# Altium PCB Layout.PcbDoc
Units mil, origin at the board's own origin, x right, y up, seen from the top; angles counter-clockwise.
Board outline 2500 x 3500 mil, 2 copper layers (Top Layer, Bottom Layer); 31 components, 42 nets, 188 pads, 47 vias.
Unrouted connection lines stored in the file: 3.
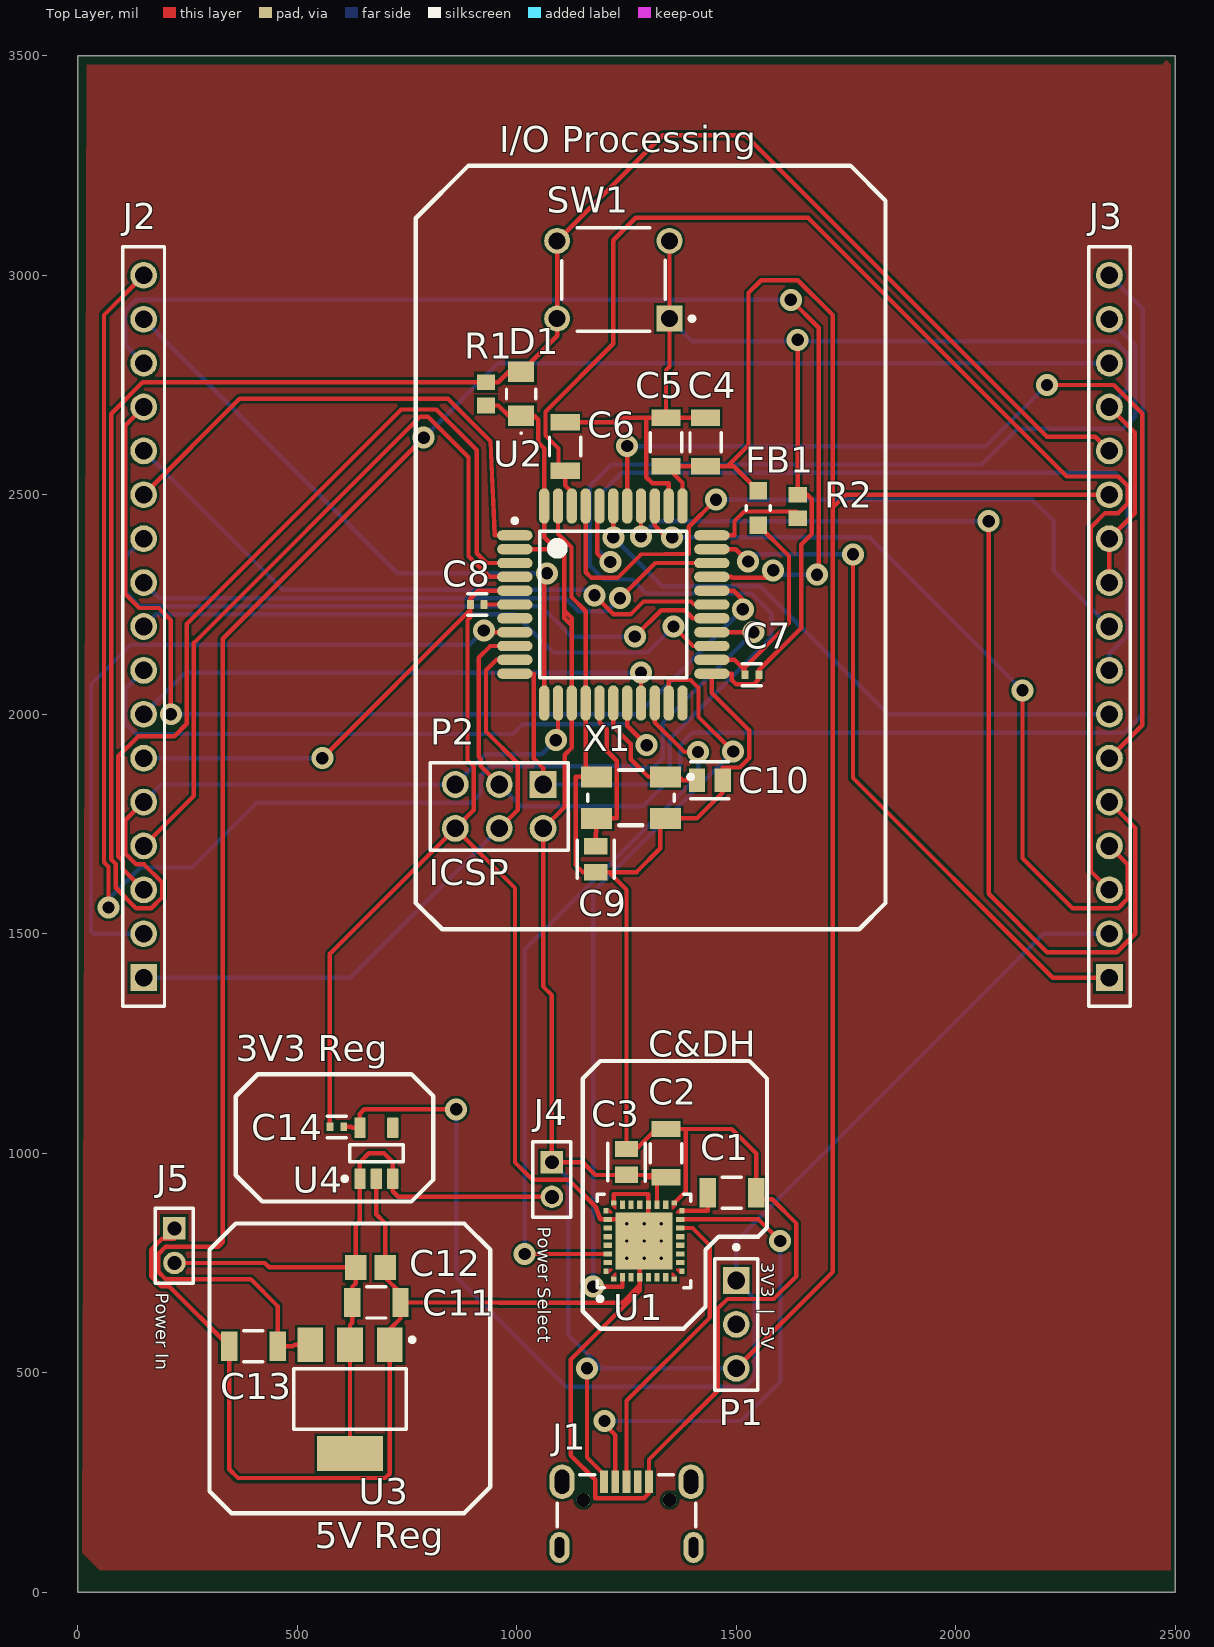
[diagram p0: Top Layer view]
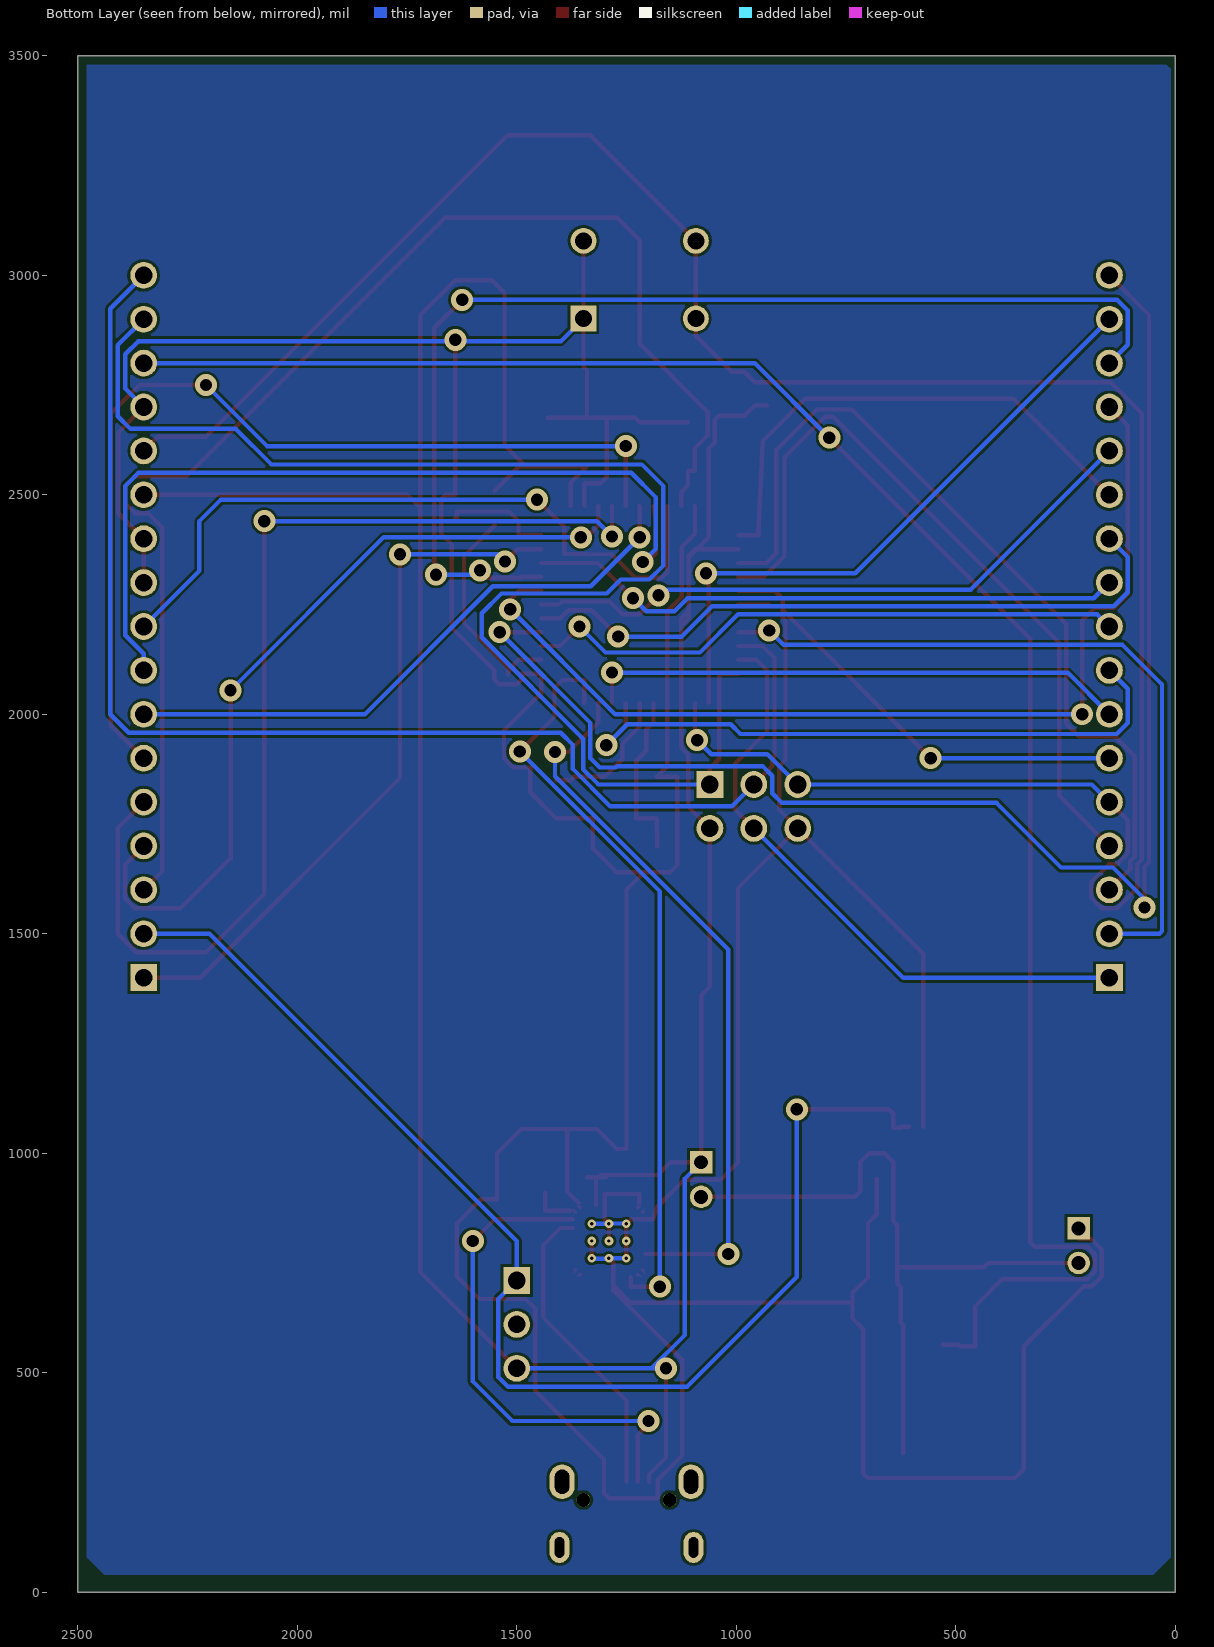
[diagram p1: Bottom Layer view, seen from below]
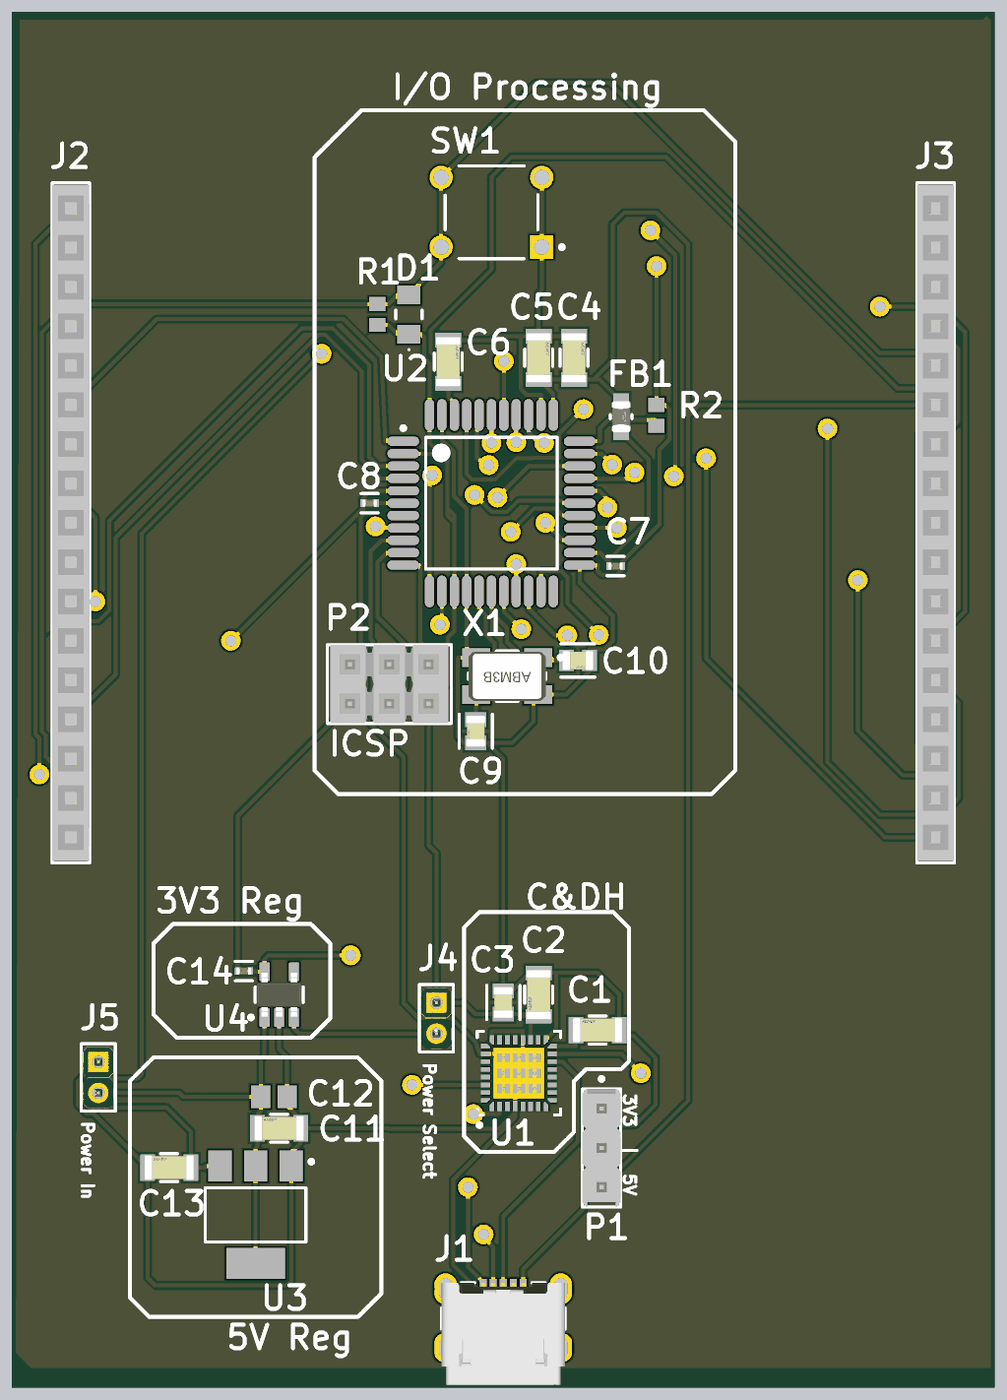
[diagram p2: 3D render of the assembled board from above, using the file's embedded part models]

## Layer stack, top to bottom
Top Solder: solder mask 0.4, Solder Resist, Dk 3.5
Top Layer: signal copper 1.4
Dielectric 1: dielectric 12.6, FR-4, Dk 4.8
Bottom Layer: signal copper 1.4
Bottom Solder: solder mask 0.4, Solder Resist, Dk 3.5

## Board outline
0,0 2500,0 2500,3500 0,3500

## Design rules (kind name [scope] priority, off if disabled: settings)
Clearance [All] p1: gap=6.2 ignorepadtopadclearanceinfootprint=FALSE
PolygonConnect [All] p1: connectstyle=Relief reliefconductorwidth=10 reliefentries=4 polygonreliefangle="90 Angle" airgapwidth=10
RoutingVias [All] p1: holewidth=28 width=50 viastyle="Through Hole" minholewidth=28 minwidth=50 maxholewidth=28 maxwidth=50
SolderMaskExpansion [All] p1: expansion=4 istentingtop=FALSE
Width [All] p1: maxlimit=10 minlimit=10 preferedwidth=10
30 further rules are at their usual default settings.

## Classes and differential pairs
component class 03-Power: C11 C12 C13 C14 J4 J5 U3 U4
component class 02-IC: C4 C5 C6 C7 C8 C9 C10 D1 FB1 J2 J3 P2 R1 R2 SW1 U2 X1
component class 01-IC: C1 C2 C3 J1 P1 U1

## Components (designator, comment, footprint, x,y, rotation, side; value= is the part's Value field where it differs from the comment)
C1 "0.1uF" FP-C1206C-EB-MFG 1490,910 r0 top value="0.10 μF"
C2 "0.1uF" FP-C1206C-EB-MFG 1340,1000 r90 top value="0.10 μF"
C3 "10uF" FP-C0805C-DG-MFG 1250,980 r90 top
C4 "0.1uF" FP-C1206C-EB-MFG 1430,2620 r270 top value="0.10 μF"
C5 "0.1uF" FP-C1206C-EB-MFG 1340,2620 r270 top value="0.10 μF"
C6 "0.1uF" FP-C1206C-EB-MFG 1110,2610 r270 top value="0.10 μF"
C7 "1uF" FP-GRM15-0_1-MFG 1535.75,2090 r0 top
C8 "1uF" FP-GRM15-0_1-MFG 910,2250 r180 top
C9 "22pF" FP-C0805C-DN-MFG 1180,1670 r90 top value="22 pF"
C10 "22pF" FP-C0805C-DN-MFG 1440,1850 r180 top value="22 pF"
C11 "0.1uF" FP-C1206C-EB-MFG 680,660 r0 top value="0.10 μF"
C12 "22uF" CAPC2013X140X45NL15T25 666.54,740 r180 top
C13 "0.1uF" FP-C1206C-EB-MFG 400,560 r0 top value="0.10 μF"
C14 "1uF" FP-GRM15-0_1-MFG 590,1060 r180 top
D1 "150mA" BOUR-CD1206-S01575-2_L 1010,2730 r270 top
FB1 "MH2029-300Y" FP-MH2029-MFG 1550,2470 r90 top value=30Ω
J1 "629105150521" 629105150521 1250,137.25 r0 top
J2 "SSQ-117-01-G-S" SMTC-SSQ-117-01-X-S 150,1400 r90 top
J3 "SSQ-117-01-G-S" SMTC-SSQ-117-01-X-S 2350,1400 r90 top
J4 "M22-2510205" FP-M22-2510205-MFG 1080,940 r270 top
J5 "M22-2510205" FP-M22-2510205-MFG 220,789.37 r270 top (schematic designator J?)
P1 "22-28-4033" MOLX-22-28-4033_V 1500,610 r270 top
P2 "TSW-103-08-G-D" SMTC-TSW-103-08-X-D 1060,1840 r180 top
R1 "10kR" RESC1609X50X30ML10T20 930,2730 r270 top
R2 "10kR" RESC1609X50X30ML10T20 1640,2473.42 r270 top
SW1 "1825910-6" TECO-1825910-6_V 1220,2990 r180 top
U1 "FT232RQ-Reel" PQFN5X5-32_V 1290,800 r90 top
U2 "ATmega32U4-AU" 44ML_M 1220,2250 r0 top
U3 "NCP1117ST33T3G" ONSC-SOT-223-4-318H-01_A_V 620,440 r270 top
U4 "LP2985-33DBVR" DBV0005A_M 680,1000 r90 top
X1 "16MHz" ABRA-ABM3B-4_V 1260,1810 r180 top

## Footprints (in the part's own frame and the unit in brackets; to place one, negate y for a bottom-side part, rotate by r counter-clockwise, add the part's x,y. Pads: shape width x height; smd on the part's side, far side on the other; paste and mask are expansions set on the pad)
44ML_M [mm] "Thin QFP, 44-Leads, Body 10x10mm, Pitch 0.8mm, IPC Low Density"
  oval 2.05x0.6 smd: 1(-5.7,4) 2(-5.7,3.2) 3(-5.7,2.4) 4(-5.7,1.6) 5(-5.7,0.8) 6(-5.7,0) 7(-5.7,-0.8) 8(-5.7,-1.6) 9(-5.7,-2.4) 10(-5.7,-3.2) 11(-5.7,-4) 23(5.7,-4) 24(5.7,-3.2) 25(5.7,-2.4) 26(5.7,-1.6) 27(5.7,-0.8) 28(5.7,0) 29(5.7,0.8) 30(5.7,1.6) 31(5.7,2.4) 32(5.7,3.2) 33(5.7,4)
  oval 0.6x2.05 smd: 12(-4,-5.7) 13(-3.2,-5.7) 14(-2.4,-5.7) 15(-1.6,-5.7) 16(-0.8,-5.7) 17(0,-5.7) 18(0.8,-5.7) 19(1.6,-5.7) 20(2.4,-5.7) 21(3.2,-5.7) 22(4,-5.7) 34(4,5.7) 35(3.2,5.7) 36(2.4,5.7) 37(1.6,5.7) 38(0.8,5.7) 39(0,5.7) 40(-0.8,5.7) 41(-1.6,5.7) 42(-2.4,5.7) 43(-3.2,5.7) 44(-4,5.7)
  silkscreen extent -5.82,-4.25 4.25,4.97, body extent -5,-5 5,5, height 1.2
629105150521 [mm] "Micro USB 2.0 SMT Type B Horizontal 5 Contacts High Current"
  rect 0.45x1.3 smd: 1(-1.3,2.9) 2(-0.65,2.9) 3(0,2.9) 4(0.65,2.9) 5(1.3,2.9)
  round 0.8 hole 0.8 unplated: MH1(-2.5,1.85) MH2(2.5,1.85)
  oval 1.15x1.8 hole 0.55 slot 1.2 at 90 deg: Shell(-3.875,-0.9) Shell(3.875,-0.9)
  oval 1.45x2 hole 0.85 slot 1.4 at 90 deg: Shell(-3.725,2.9) Shell(3.725,2.9)
  silkscreen extent -4,0.3 4,3.3, body extent -4,-3.3 4,3.3, height 2.75
ABRA-ABM3B-4_V [mm] "SMD, 4-Leads, Body 5x3.2mm"
  rect 1.8x1.2 smd: 1(-2,-1.2) 2(2,-1.2) 3(2,1.2) 4(-2,1.2)
  silkscreen extent -3.58,-1.6 2.5,1.6, body extent -2.5,-1.59 2.5,1.59, height 1.13
BOUR-CD1206-S01575-2_L [mm] "Molded Diode, 2-Leads, Body 3.4x1.7mm, IPC High Density"
  rect 1.2x1.5 smd: 1(-1.275,0) 2(1.275,0)
  silkscreen extent -0.27,-0.85 2.32,0.85, body extent -1.7,-0.85 1.7,0.85, height 0.95
CAPC2013X140X45NL15T25 [mm] "Chip Capacitor, 2-Leads, Body 2.00x1.25mm, IPC Medium Density"
  rect 1.25x1.45 smd: 1(-0.85,0) 2(0.85,0)
  body extent -1.08,-0.7 1.07,0.7, height 1.4
DBV0005A_M [mm] "SOT23, 5-Leads, Body 3.05x1.75mm, Pitch 0.95mm, IPC Low Density"
  rrect15% 1.2x0.65 smd: 1(-1.475,0.95) 2(-1.475,0) 3(-1.475,-0.95) 4(1.475,-0.95) 5(1.475,0.95)
  silkscreen extent -1.6,-1.55 0.5,1.95, body extent -1.42,-1.46 1.42,1.46, height 1.08
FP-C0805C-DG-MFG [mm]
  rect 0.95x1.35 smd paste+0 mask+0: 1(-0.75,0) 2(0.75,0)
  silkscreen extent -1.11,-1.08 1.1,1.07, body extent -1.4,-0.85 1.4,0.85, height 0.25
FP-C0805C-DN-MFG [mm]
  rect 0.95x1.35 smd paste+0 mask+0: 1(-0.75,0) 2(0.75,0)
  silkscreen extent -1.1,-1.07 1.1,1.07, body extent -1.4,-0.85 1.4,0.85, height 0.25
FP-C1206C-EB-MFG [mm]
  rect 0.95x1.7 smd paste+0 mask+0: 1(-1.4,0) 2(1.4,0)
  silkscreen extent -0.55,-0.9 0.55,0.9, body extent -2,-1 2,1, height 0.25
FP-GRM15-0_1-MFG [mm]
  rect 0.4x0.5 smd paste+0 mask+0: 1(-0.4,0) 2(0.4,0)
  silkscreen extent -0.55,-0.62 0.55,0.62, body extent -0.7,-0.38 0.7,0.38, height 0.25
FP-M22-2510205-MFG [mm]
  rect 1.3x1.3 hole 0.8 paste-1000 mask+0: 1(-1,0)
  round 1.3 hole 0.8 paste-1000 mask+0: 2(1,0)
  silkscreen extent -2.18,-1.1 2.18,1.1, body extent -2.27,-1.2 2.27,1.2, height 0.25
FP-MH2029-MFG [mm]
  rect 1x1 smd paste+0 mask+0: 1(-1,0) 2(1,0)
  silkscreen extent -0.13,-0.7 0.13,0.7, body extent -1.6,-0.8 1.6,0.8, height 0.25
MOLX-22-28-4033_V [mm] "THD, 3-Leads, Body 7.62x2.49mm, Pitch 2.54mm"
  rect 1.55x1.55 hole 1.02: 1(-2.54,0)
  round 1.55 hole 1.02: 2(0,0) 3(2.54,0)
  silkscreen extent -4.58,-1.25 3.81,1.25, body extent -3.81,-1.24 3.81,1.24, height 8.38
ONSC-SOT-223-4-318H-01_A_V [mm] "SOT223, 4-Leads, Body 6.5x3.5mm, Pitch 2.3mm"
  rect 2x1.5 smd: 1(-3.15,2.3) 2(-3.15,0) 3(-3.15,-2.3)
  rect 2x3.8 smd: 4(3.15,0)
  silkscreen extent -3.55,-3.25 1.75,3.73, body extent -1.75,-3.25 1.75,3.25, height 1.8
PQFN5X5-32_V [mm] "QFN, 32-Leads, Body 5x5mm, Pitch 0.5mm, Thermal Pad 3.3x3.3mm, FTDI Recommended"
  rect 0.3x0.3 smd paste-0.15 mask-0.15: 1(-2.2,1.75) 8(-2.2,-1.75) 9(-1.75,-2.2) 16(1.75,-2.2) 17(2.2,-1.75) 24(2.2,1.75) 25(1.75,2.2) 32(-1.75,2.2)
  rect 0.5x0.3 smd paste-0.15 mask+0.06: 2(-2.1,1.25) 3(-2.1,0.75) 4(-2.1,0.25) 5(-2.1,-0.25) 6(-2.1,-0.75) 7(-2.1,-1.25) 18(2.1,-1.25) 19(2.1,-0.75) 20(2.1,-0.25) 21(2.1,0.25) 22(2.1,0.75) 23(2.1,1.25)
  rect 0.3x0.5 smd paste-0.15 mask+0.06: 10(-1.25,-2.1) 11(-0.75,-2.1) 12(-0.25,-2.1) 13(0.25,-2.1) 14(0.75,-2.1) 15(1.25,-2.1) 26(1.25,2.1) 27(0.75,2.1) 28(0.25,2.1) 29(-0.25,2.1) 30(-0.75,2.1) 31(-1.25,2.1)
  rect 3.3x3.3 smd paste-1.65 mask+0.06: 33(0,0)
  Top Layer region: 1.6,-1.85 1.6,-2.05 1.9,-2.05 1.7,-1.85
  Top Layer region: -1.6,2.05 -1.6,1.85 -1.7,1.85 -1.9,2.05
  Top Layer region: 1.6,2.05 1.6,1.85 1.7,1.85 1.9,2.05
  Top Layer region: -1.6,-2.05 -1.6,-1.85 -1.7,-1.85 -1.9,-2.05
  Top Layer region: -2.05,1.6 -1.85,1.6 -1.85,1.7 -2.05,1.9
  Top Layer region: 2.05,1.6 1.85,1.6 1.85,1.7 2.05,1.9
  Top Layer region: 2.05,-1.6 1.85,-1.6 1.85,-1.7 2.05,-1.9
  Top Layer region: -2.05,-1.6 -1.85,-1.6 -1.85,-1.7 -2.05,-1.9
  silkscreen extent -3.47,-2.7 2.7,2.7, body extent -2.55,-2.55 2.55,2.55, height 1
RESC1609X50X30ML10T20 [mm] "Chip Resistor, 2-Leads, Body 1.55x0.85mm, IPC Low Density"
  rect 0.9x1.05 smd: 1(-0.675,0) 2(0.675,0)
  body extent -0.82,-0.48 0.82,0.48, height 0.5
SMTC-SSQ-117-01-X-S [mm] "SQ Post Socket, 1x17 Pins, Vertical, 2.54mm Pitch, Female"
  rect 1.55x1.55 hole 1.02: 1(0,0)
  round 1.55 hole 1.02: 2(2.54,0) 3(5.08,0) 4(7.62,0) 5(10.16,0) 6(12.7,0) 7(15.24,0) 8(17.78,0) 9(20.32,0) 10(22.86,0) 11(25.4,0) 12(27.94,0) 13(30.48,0) 14(33.02,0) 15(35.56,0) 16(38.1,0) 17(40.64,0)
  silkscreen extent -1.65,-1.2 42.29,1.2, body extent -1.52,-1.21 42.16,1.21, height 8.51
SMTC-TSW-103-08-X-D [mm] ".025 SQ Post Terminal Strip Assembly, 2x3 Pins, Vertical, 2.54mm Pitch, Male"
  rect 1.55x1.55 hole 1.02: 1(0,0)
  round 1.55 hole 1.02: 2(0,2.54) 3(2.54,0) 4(2.54,2.54) 5(5.08,0) 6(5.08,2.54)
  silkscreen extent -1.46,-1.27 6.54,3.81, body extent -1.27,-1.27 6.35,3.81, height 8.38
TECO-1825910-6_V [mm] "Switch, 4-Leads, Body 5.99x5.99mm"
  rect 1.5x1.5 hole 0.99: 1(-3.25,2.25)
  round 1.5 hole 0.99: 2(3.25,2.25) 3(-3.25,-2.25) 4(3.25,-2.25)
  silkscreen extent -4.68,-3 3,3, body extent -3,-2.99 2.99,3, height 5

## Part data
C1 C2 C4 C5 C6 C11 C13: library part CMP-03020-000153-1, "CAP CER 0.1UF 100V X7R 1206", Capacitance="0.10 μF", Manufacturer=KEMET, Manufacturer Part Number=C1206C104K1RACTU, Package=C1206C-EB, Temperature="-55°C to +150°C", Temperature Characteristic=X7R, Temperature Coefficient=15%, Temperature Range High=+150°C, Temperature Range Low=-55°C, Tolerance=0.1, Voltage Rating="100 V", Automotive=Yes, Automotive Grade="Grade 0", Category=Cap, ComponentLink2Description=Datasheet, ComponentLink2URL=https://content.kemet.com/datasheets/KEM_C1007_X8R_ULTRA_150C_SMD.pdf, Device Class L1="Passive Components", Device Class L2=Capacitors, Device Class L3="Ceramic Capacitors", Digikey Description="CAP CER 0.1UF 100V X7R 1206", Height=0.88mm, Ipc Land Pattern Name=CAPC320160X78, Lead Free=Yes, Material=Ceramic, Mouser Description="CAP CER 0.1UF 100V X7R 1206", Octopart=https://octopart.com/c1206c104k1ractu-kemet-89521, RoHS=TRUE
C3: library part CMP-03020-001692-1, "CAP CER 10UF 10V X5R 0805", 3DS Part Number=220-00001, Manufacturer=Kemet, Manufacturer Part Number=C0805C106K8PACTU, Package=C0805C-DG, Temperature="-55°C to +85°C", Temperature Characteristic=X5R, Temperature Coefficient=15%, Temperature Range High=+85°C, Temperature Range Low=-55°C, Tolerance=10%, Voltage=10V, Automotive=No, Capacitance=10uF, Category=Cap, ComponentLink2Description=Datasheet, ComponentLink2URL=https://content.kemet.com/datasheets/KEM_C1006_X5R_SMD.pdf, Device Class L1="Passive Components", Device Class L2=Capacitors, Device Class L3="Ceramic Capacitors", Digikey Description="CAP CER 10UF 10V X5R 0805", Height=1.4mm, Ipc Land Pattern Name=CAPC200125X125, Lead Free=Yes, Material=Ceramic, Mouser Description="CAP CER 10UF 10V X5R 0805", Octopart=https://octopart.com/c0805c106k8pactu-kemet-98697, RoHS=TRUE, Voltage Rating=10V
C7 C8 C14: library part CMP-06035-000073-1, "CAP CER 1UF 10V X5R 0402", Manufacturer=Murata, Manufacturer Part Number=GRM155R61A105KE15D, Package=GRM15-0.1, Temperature="-55°C to +85°C", Temperature Characteristic=X5R, Temperature Coefficient=15%, Temperature Range High=+85°C, Temperature Range Low=-55°C, Tolerance=10%, Voltage Rating=10V, Automotive=No, Capacitance=1uF, Category=Cap, ComponentLink2Description=Datasheet, ComponentLink2URL=https://search.murata.co.jp/Ceramy/image/img/A01X/G101/ENG/GRM155R61A105KE15-01A.pdf, Device Class L1="Passive Components", Device Class L2=Capacitors, Device Class L3="Ceramic Capacitors", Digikey Description="CAP CER 1UF 10V X5R 0402", Height=0.55mm, Ipc Land Pattern Name=CAPC10050X50, Lead Free=Yes, Material=Ceramic, Mouser Description="0402 1 uF 10 V ±10% Tolerance X5R Surface Mount Multilayer Ceramic Capacitor", Octopart=https://octopart.com/grm155r61a105ke15d-murata-197442, RoHS=TRUE
C9 C10: library part CMP-03020-014268-1, "Capacitor; Ceramic; Cap; 22.0pF; Tol 5%; SMT; Vol-Rtg 50V; C0G; Tape and Reel", Capacitance="22 pF", Manufacturer=KEMET, Manufacturer Part Number=C0805C220J5GACTU, Package=C0805C-DN, Temperature="-55°C to +125°C", Temperature Characteristic=C0G, Temperature Coefficient=30ppm/°C, Temperature Range High=+125°C, Temperature Range Low=-55°C, Tolerance=0.05, Voltage Rating="50 V", Automotive=No, Category=Cap, ComponentLink2Description=Datasheet, ComponentLink2URL=https://content.kemet.com/datasheets/KEM_C1003_C0G_SMD.pdf, Device Class L1="Passive Components", Device Class L2=Capacitors, Device Class L3="Ceramic Capacitors", Digikey Description="Capacitor; Ceramic; Cap; 22.0pF; Tol 5%; SMT; Vol-Rtg 50V; C0G; Tape and Reel", Height=0.88mm, Ipc Land Pattern Name=CAPC200125X78, Lead Free=Yes, Material=Ceramic, Mouser Description="Multilayer Ceramic Capacitors MLCC - SMD/SMT 50volts 22pF C0G 5%", Octopart=https://octopart.com/c0805c220j5gactu-kemet-145470, RoHS=TRUE
C12: library part CMP-2007-03385-1, Manufacturer=Murata, Part Number=GRM21BR60J226ME39L
D1: library part CMP-0583-00001-2, "75 V Small Signal Switching Diode, 150 mA, 2.5 uA, 1026 Molded Package, RoHS, Tape and Reel", Average Forward Current="150 mA", Capacitance Between Terminals (Max.)="3 pF", Forward Voltage (Max.)="1.00 V", Manufacturer=Bourns, PartNumber=CD1206-S01575, Reverse Current (Max.)="2.5 uA", Reverse Voltage="75 V", ComponentLink1Description="Manufacturer URL", ComponentLink1URL=http://www.bourns.com/, ComponentLink2Description=Datasheet, ComponentLink2URL=http://www.bourns.com/data/global/pdfs/CD1206_S01575.pdf, ComponentLink3Description="Package Specification", ComponentLink3URL=http://www.bourns.com/data/global/pdfs/CD1206_S01575.pdf, DatasheetVersion="Rev. 06/11", Mounting Technology="Surface Mount", PackageDescription="2-Pin SMD, Body 3.2 x 1.5 mm", PackageReference=CD1206-S01575-2, Packing="Tape and Reel", Reverse Recovery Time (Max.)="4 nS", RoHS=TRUE
FB1: library part CMP-07252-000001-1, "FERRITE BEAD 30 OHM 0805 1LN", Impedance At Frequency="30Ω @ 100MHz", Manufacturer=Bourns, Package=MH2029, Resistance=30Ω, Rms Current=3A, Series Resistance=25mΩ, Temperature="-55°C to +125°C", Temperature Range High=+125°C, Temperature Range Low=-55°C, Tolerance=25%, Automotive=No, Category=FBead, ComponentLink2Description=Datasheet, ComponentLink2URL=https://www.bourns.com/docs/Product-Datasheets/mh.pdf, Core Material=Ferrite, Device Class L1="Passive Components", Device Class L2="EMI / RFI Components", Device Class L3="Ferrite Beads and Chips", Digikey Description="FERRITE BEAD 30 OHM 0805 1LN", Height=1.1mm, Ipc Land Pattern Name=CAPC200120X90, Lead Free=Yes, Manufacturer Part Number=MH2029-300Y, Mouser Description="Ferrite Beads 30 ohms 25% HIGH CURRENT", Octopart=https://octopart.com/mh2029-300y-bourns-756929, RoHS=TRUE
J1: library part CMP-1502-03252-1, "Micro USB 2.0 Type B Receptacle WR-COM, Horizontal, SMT, with Pegs, High Current at Pin 1 & Pin 5", Contact Resistance=30mOhm, Manufacturer="Wurth Elektronik", Operating Temperature=-40to85degC, Rated Current=3A, Working Voltage=30VAC, Connector Type=MicroUSB2.0TypeB, Datasheet URL=https://katalog.we-online.de/em/datasheet/629105150521.pdf, Gender=Receptacle, Manufacturer URL=http://www.we-online.de, Mounting Technology=SMT, Orientation=Horizontal, Package Reference=629105150521, Packaging=TapeandReel, Part Number=629105150521, Publisher=WurthElektronik
J2 J3: library part CMP-1023-00316-1, "SQ Post Socket, Through-hole, Vertical, -55 to 125 degC, 2.54 mm Pitch, 17-Pin, Female, RoHS", Manufacturer=Samtec, Temperature Range="-55 to 125 degC", ComponentLink1Description="Manufacturer URL", ComponentLink1URL=http://www.samtec.com, ComponentLink2Description=Datasheet, ComponentLink2URL=http://www.samtec.com/documents/webfiles/pdf/SSQ_TH.PDF, ComponentLink3Description="Package Specification", ComponentLink3URL=http://www.samtec.com/documents/webfiles/cpdf/SSQ-1XX-XX-XXX-X-XX-XXX-XX-X-MKT.pdf, DatasheetVersion=F-214, Mounting Technology=Through-hole, Orientation=Vertical, PackageDescription="Assembly, Socket Strip .025[0.64] SQ Tail", PackageReference=SSQ-117-01-X-S, PackageVersion="BD, 6/1987", PartNumber=SSQ-117-01-G-S, Pitch="2.54 mm", RoHS=True
J4 J5: library part CMP-15831-000005-1, "CONN HEADER VERT 2POS 2MM", Current Rating=2A, Manufacturer=Harwin, Package=0, Temperature="-40°C to +105°C", Temperature Range High=+105°C, Temperature Range Low=-40°C, Automotive=No, Category=Conn, ComponentLink2Description=Datasheet, ComponentLink2URL=https://cdn.harwin.com/pdfs/C018XX_M22_Series_Connectors.pdf, Conn Gender=Male, Conn Orientation=Vertical, Contact material=Gold,Nickel, Device Class L1=Connectors, Device Class L2="Headers and Wire Housings", Device Class L3=unset, Digikey Description="CONN HEADER VERT 2POS 2MM", Footprint Url=https://cdn.harwin.com/pdfs/M22-251.pdf, Height=5.45mm, Lead Free=Yes, Manufacturer Part Number=M22-2510205, Mouser Description="Headers & Wire Housings 2 PIN SIL VERTICAL GOLD PIN HEADER", Number Of Contacts=2, Number Of Rows=1, Octopart=https://octopart.com/m22-2510205-harwin-2538221, Pitch=2mm, RoHS=TRUE
P1: library part CMP-1676-00001-5, "Male Header, Pitch 2.54 mm, 1 x 3 Position, Height 8.38 mm, Tail Length 3.18 mm, RoHS, Bulk", Colour=Black, Current Rating="4 A", Manufacturer=Molex, Max Operating Temperature="75 degC", Min Operating Temperature="0 degC", Package Quantity=1, Voltage Rating="250 V", ComponentLink1Description="Manufacturer URL", ComponentLink1URL=http://www.molex.com/, ComponentLink2Description=Datasheet, ComponentLink2URL=http://www.molex.com/pdm_docs/sd/022284033_sd.pdf, Contact Finish=Gold, Contact material=Brass, Contact Plating=Gold, DatasheetVersion="Rev. G, 01/2012", Height="8.38 mm", Lead Pitch="0.1 inch", Length="7.62 mm", Mount="Through Hole", Mounting Technology="Through Hole", PackageDescription="Male Header, Pitch 2.54 mm, 1 x 3 Position, Height 8.38 mm, Tail Length 3.18 mm", PackageReference=22-28-4033, Packaging=Bulk, Pins=3, REACH SVHC=Unknown, RoHSCompliant=true, Rows=1
P2: library part CMP-1024-00338-1, "0.025\" SQ Post Header, Through-hole, Vertical, -55 to 125 degC, 2.54 mm Pitch, 6-Pin, Male, RoHS", Manufacturer=Samtec, Temperature Range="-55 to 125 degC", ComponentLink1Description="Manufacturer URL", ComponentLink1URL=http://www.samtec.com, ComponentLink2Description=Datasheet, ComponentLink2URL=http://www.samtec.com/documents/webfiles/pdf/TSW_TH.PDF, ComponentLink3Description="Package Specification", ComponentLink3URL=http://www.samtec.com/documents/webfiles/cpdf/TSW-XXX-XX-XXX-X-XX-XXX-MKT.pdf, DatasheetVersion=F-214, Mounting Technology=Through-hole, Orientation=Vertical, PackageDescription=".025[0.64] SQ. Post Terminal Strip Assembly", PackageReference=TSW-103-08-X-D, PackageVersion="DM, 8/1988", PartNumber=TSW-103-08-G-D, Pitch="2.54 mm", RoHS=True
R1 R2: library part CMP-2000-03838-1, Manufacturer="Vishay Dale", Part Number=CRCW060310K0JNEA
SW1: library part CMP-1684-00021-1, "Tact Switch, SPST-NO, 0.05 A, -35 to 85 degC, 4-Pin THD, RoHS, Bulk", Actuator Color=Black, Contact Rating @ Voltage=0.05A@24VDC, Dielectric Strength=500VAC, Manufacturer="TE Connectivity", Maximum AC Voltage Rating=N/A, Maximum Contact Resistance=100mOhm, Maximum DC Voltage Rating=24V, Minimum Insulation Resistance=100MOhm, Operating Temperature=-35to85C, Package Description="4-Pin Through Hole Device, Body 5.99 x 5.99 mm, Pitch 6.5 mm", Package Reference=THD, Actuator Length=1.4mm, Actuator Material=PolybutyleneTerephthalate, Actuator Style=RoundButton, Base Material=N/A, Body Orientation=Straight, Bushing Type=Unthreaded, Contact material=CopperAlloy, Contact Plating=Silver, Datasheet URL=http://www.te.com/commerce/DocumentDelivery/DDEController?Action=showdoc&DocId=Customer+Drawing%7F1825910%7FC9%7Fpdf%7FEnglish%7FENG_CD_1825910_C9.pdf%7F1825910-6, Datasheet Version="Rev. C9", Dimension=5.99x5mm, Electrical Life=100000Cycles, Family=1825910, Function=MomentaryContact, Housing material=N/A, Illumination=N/R, Manufacturer URL=http://www.te.com, Mechanical Life=100000Cycles, Mounting=ThroughHole, Packaging=N/A, Part No=1825910-6, Pole Throw Configuration=SPST, Product Weight=N/A, RoHS=Yes, Seal Description=N/A, Seal Location=N/A, Switch Configuration=OFF(ON), Terminal Type=PCPins, Thread Size=N/R
U1: library part CMP-0078-00009-3, "USB UART Asynchronous Serial Data Transfer Chip, 32-pin QFN, Tape and Reel", Manufacturer=FTDI, ComponentLink1Description="Manufacturer URL", ComponentLink1URL=http://www.ftdichip.com/, ComponentLink2Description=Datasheet, ComponentLink2URL=http://www.ftdichip.com/Support/Documents/DataSheets/ICs/DS_FT232R.pdf, DatasheetVersion="ver 2.10, Mar-2012", PackageDescription="32-Pin Quad Flat No-Lead 0.5 mm Pitch, Pullback, 3.2 x 3.2 mm Exposed Pad", PackageReference=PQFN5X5-32, PackageVersion=Mar-12, PartNumber=FT232RQ-Reel, RevisionNote="DatasheetVersion updated to 2.10 Mar-2012"
U2: library part CMP-0095-00285-2, "8-bit AVR Microcontroller, 2.7-5.5V, 16MHz, 32KB Flash, 1KB EEPROM, 2.5KB SRAM, USB Controller, 44-pin TQFP, Industrial Grade (-40°C to 85°C), Ext Osc", ComponentLink1Description="Manufacturer URL", ComponentLink1URL=http://www.atmel.com/, ComponentLink2Description="ATmega16U4/32U4 Datasheet", ComponentLink2URL=http://www.atmel.com/dyn/resources/prod_documents/doc7766.pdf, ComponentLink3Description="ATmega16U4 ATmega32U4 Summary", ComponentLink3URL=http://www.atmel.com/dyn/resources/prod_documents/7766S.pdf, DatasheetVersion="revF, Nov-2010", PackageDescription="44-Pin Plastic Thin Quad Flat Pack, 10 x 10 x 1.0 mm Body, 0.8 mm Pitch (TQFP)", PackageReference=44ML, PackageVersion="rev.G, Jul-2007", RevisionNote="DatasheetVersion updated. URLs added."
U3: library part CMP-1679-00010-1, "Low-Dropout Positive Fixed Voltage Regulator, 1 A, 3.3 V Output Voltage, 0 to 125 degC, 4-Pin SOT-223 (318H-01), Pb-Free, Tape and Reel", Case Code (Imperial)=0603, Case Code (Metric)=1608, Max Operating Temperature="155 degC", Min Operating Temperature="-55 degC", Package Quantity=5000, Power Rating="100 mW", Resistance="220 kohm", Tolerance=1%, Type (Resistor)="Thick Film", Voltage Rating="75 V", Case\Package=0603, ComponentLink1Description="Manufacturer URL", ComponentLink1URL=http://www.onsemi.com/, ComponentLink2Description=Datasheet, ComponentLink2URL=http://www.onsemi.com/pub_link/Collateral/NCP1117-D.PDF, DatasheetVersion="Rev. 27, 09/2014", Height="0.45 mm", Length="1.55 mm", Mount="Surface Mount", PackageDescription="4-Pin Small Outline Transistor, Body 6.5 x 3.5 mm, Pitch 2.3 mm", PackageReference=SOT-223-4-318H-01_A, Packaging="Tape and Reel", Radiation Hardening=No, REACH SVHC=Unknown, RoHSCompliant=true, Weight="7.1E-05 oz", Width="0.85 mm"
U4: library part CMP-0758-00080-2, "Single Output Low Noise LDO, 150 mA, Fixed 3.3 V Output, 1.5% Tolerance, 2.2 to 16 V Input, Low IQ, 5-Pin SOT-23 (DBV), -40 to 125 degC, Green (RoHS & no Sb/Br), Tape and Reel", Manufacturer="Texas Instruments", Operating Temperature Range (degC)="-40 to 125", Accuracy (%)=1.5, ComponentLink1Description="Manufacturer URL", ComponentLink1URL=http://www.ti.com/, ComponentLink2Description=Datasheet, ComponentLink2URL=http://www.ti.com/lit/ds/symlink/lp2985-50.pdf, ComponentLink3Description="Package Specification", ComponentLink3URL=http://www.ti.com/litv/pdf/mpds018j, DatasheetVersion=SLVS522N, Fixed Output Options (V)=3.3, Iout (Max) (A)=0.15, Iq (Typ) (mA)=0.85, Mounting Technology="Surface Mount", Output Options="Fixed Output", PackageDescription="5-Pin Plastic Small Outline, Body 2.9 x 1.6 mm, Pitch 0.95 mm", PackageReference=DBV0005A, PackageVersion=4073253-4/L, Packing="Tape and Reel", PartNumber=LP2985-33DBVR, RoHS=TRUE, Vdo (Typ) (mV)=280, Vin (V)="2.2 to 16"
X1: library part CMP-1688-00003-1, "Ceramic SMD Crystal, 16 MHz, +/- 20 ppm, 50 Ohm, -20 to 70 degC, 4-Pin SMD, RoHS, Tape and Reel", Case/Package=5028, Current Rating="1.82 A", Max Operating Temperature=105degC, Min Operating Temperature=-40degC, Package Quantity=500, Resistance="0.033 Ohm", Tolerance=30%, ComponentLink1Description="Manufacturer URL", ComponentLink1URL=http://www.abracon.com/, ComponentLink2Description=Datasheet, ComponentLink2URL=http://www.abracon.com/Resonators/abm3b.pdf, DatasheetVersion=Aug-15, Height="2.8 mm", Length="0.197 inch", Mount="Surface Mount", PackageDescription="4-Pin Surface Mount Device, Body 5 x 3.2 mm", PackageReference=ABM3B, Packaging="Tape and Reel", REACH SVHC=Unknown, RoHSCompliant=True, Shielding=Shielded, Width="0.197 inch"

## Via types
v1: diameter 50, hole 28, Top Layer to Bottom Layer, 38 vias
v2: diameter 19.68, hole 7.87, Top Layer to Bottom Layer, tented top, 9 vias

## Nets (pads, with @x,y where several pads share a name; then routed paths per layer and width w, separated by ;. In a path a pad name is that pad's centre, name@x,y a point inside that pad or via, vN(x,y) a via of type N, cw(c..) or ccw(c..) an arc to the next point about the centre after c; other vN are vias at no path point)
3V3: C14.1 J3.2 P1.1 U4.5 | length 2935.1
  Top Layer w10: C14.1 623,1060 624.93,1058.07 U4.5 642.6,1090 652.6,1100 v1(862,1100)
  Bottom Layer w10: v1(862,1100) 862,718 1112,468 1520,468 1542,490 1542,668 P1.1 1500,800 2200,1500 J3.2
3V3_FTDI: C1.1 U1.16 | length 99.4
  Top Layer w10: U1.16 1434.88,868.9 C1.1
5V: C2.1 C3.1 C4.2 C5.2 D1.2 FB1.2 J1.1 J3.12 J4.1 P1.3 P2.2 R1.2 U1.19 U2.2 U2.14 U2.34 U2.44 | length 7980.2
  Top Layer w10: R1.2 958,2703.42 981.62,2679.8 D1.2 1040,2679.8 1049.13,2670.67 1049.13,2619.02 1062.52,2605.63 U2.44 1062.52,2403 1089.54,2375.98 ; U2.2 1089.54,2375.98 ; v1(1160,510) 1160,306.98 1198.82,268.16 J1.1 ; U1.19 1319.53,940 C2.1@1314.65,944.88 ; C2.1 C2.1@1314.65,944.88 ; U2.34 1377.48,2527.4 C5.2 C4.2 1480,2564.88 ; P1.3 1720.25,730.25 1720.25,2471.25 ; FB1.2 1494.49,2564.88 1480,2564.88 ; J3.12 1749,2500 1720.25,2471.25 ; 1089.54,2375.98 1108.42,2357.1 ; 1089.54,2375.98 1094.26,2375.98 1108.42,2361.82 1108.42,2357.1 ; 1108.42,2235.53 1108.42,2218.44 1125.51,2201.36 ; 1108.42,2235.53 1108.42,2357.1 ; 1108.42,2235.53 1125.51,2218.44 1125.51,2201.36 ; 1125.51,2201.36 U2.14 1125.51,1924 1109,1907.49 1109,1789 P2.2 1060,1380 1080,1360 J4.1 1150,979.37 1178.9,950.47 C3.1 1292,950.47 ; 1292,950.47 1309.06,950.47 C2.1@1314.65,944.88 ; 1292,950.47 1297.59,944.88 C2.1@1314.65,944.88 ; 1480,2564.88 1528,2612.88 1528,2960 1557,2989 1640,2989 1720.25,2908.75 1720.25,2471.25
  Bottom Layer w10: J4.1 1117,942.37 1117,586 1193,510 P1.3 v1(1160,510)
5V_PWR: C11.1 C12.2 J4.2 J5.2 U3.2 U3.4 U4.1 U4.3 | length 1616.6
  Top Layer w10: J5.2 426,750 436,740 C12.2 ; U3.4 U3.2 620,609 624.88,613.88 C11.1 624.88,695 633.07,703.19 C12.2 ; J4.2 730,900.63 717.4,913.23 U4.3 717.4,980 697.4,1000 662.6,1000 642.6,980 U4.1 642.6,845.53 633.07,836 C12.2
A0: J3.4 U2.36 | length 1853.6
  Top Layer w10: U2.36 1314.49,2430 1341.49,2403 v1(1354,2403) ; v1(2152,2054.4) 2152,1672 2266,1558 2370,1558 2392,1580 2392,1658 J3.4
  Bottom Layer w10: v1(1354,2403) 1803.4,2403 v1(2152,2054.4)
A1: J3.5 U2.37 | length 2455.9
  Top Layer w10: v1(1282.99,2404.99) U2.37 ; v1(2075,2440) 2075,1591 2208,1458 2367,1458 2409,1500 2409,1741 J3.5
  Bottom Layer w10: v1(1282.99,2404.99) 1318,2440 v1(2075,2440)
A2: J3.6 U2.38 | length 2210.7
  Top Layer w10: U2.38 v1(1251.5,2611) ; v1(2208,2750) 2360,2750 2425,2685 2425,1975 J3.6
  Bottom Layer w10: v1(1251.5,2611) 2069,2611 v1(2208,2750)
A3: J3.7 U2.39 | length 1368.3
  Top Layer w10: v1(1220,2403) U2.39
  Bottom Layer w10: v1(1220,2403) 1331.6,2291.4 1554.64,2291.4 1846.04,2000 J3.7
A4: J3.8 U2.40 | length 1987.5
  Top Layer w10: U2.40 1183,2433.5 1183,2367 1203,2347 v1(1213,2347)
  Bottom Layer w10: v1(1213,2347) 1183,2377 1183,2494 1239,2550 2362,2550 2392,2520 2392,2180 2350,2138 J3.8
A5: J3.9 U2.41 | length 1643.9
  Top Layer w10: U2.41 1157.01,2323.59 1170,2310.6 1229.4,2310.6 1282.8,2364 1392,2366 1392,2427 v1(1454,2489)
  Bottom Layer w10: v1(1454,2489) 2174,2489 2223,2440 2223,2327 J3.9
AREF: C6.2 J3.3 U2.42 | length 3138.9
  Top Layer w10: U2.42 1125.51,2506 1110,2521.51 C6.2 1095,2554.88 1095,2605.33 1065.33,2635 1065.33,2689.33 1220,2844 1220,3080 1271,3131 1663.71,3131 2253,2541.71 2370,2541.71 2391.71,2520 2391.71,2480 2370,2458.29 2340,2458.29 2308,2426.29 2308,1642 J3.3
D2/SDA: J2.7 U2.19 | length 1241.8
  Top Layer w10: U2.19 v1(1282.99,2095.01)
  Bottom Layer w10: J2.7 245.01,2095.01 v1(1282.99,2095.01)
D3/SCL: J2.8 U2.18 | length 1479.2
  Top Layer w10: U2.18 1251.5,1974 v1(1296,1929.5)
  Bottom Layer w10: J2.8 108,2058 108,1980 133,1955 990.59,1955 1012.8,1977.21 1248.28,1977.21 v1(1296,1929.5)
D4: J2.9 U2.25 | length 1385
  Top Layer w10: v1(1357,2200) 1401.49,2155.51 U2.25
  Bottom Layer w10: J2.9 177.91,2227.91 995.77,2227.91 1082.88,2140.8 1297.8,2140.8 v1(1357,2200)
D5: J2.10 U2.31 | length 1367
  Top Layer w10: v1(1235.16,2264.47) 1315.17,2344.49 U2.31
  Bottom Layer w10: J2.10 185.53,2264.47 1111,2264.47 1140.82,2234.64 1205.33,2234.64 v1(1235.16,2264.47)
D6: J2.11 U2.27 | length 1550.2
  Top Layer w10: v1(1269,2177) 1329,2237 1382.5,2237 1401,2218.5 U2.27
  Bottom Layer w10: J2.11 108,2358 108,2278 140,2246 1055,2246 1124,2177 v1(1269,2177)
D7: J2.12 U2.1 | length 1180.9
  Top Layer w10: J2.12 368.6,2718.6 843.4,2718.6 940,2622 950,2407.48 U2.1
D+: J2.4 U2.4 | length 1738
  Top Layer w10: J2.4 264.4,1814.4 264.4,2162.5 780,2678.1 797.4,2678.1 890,2585.5 890,2360 937.01,2312.99 U2.4
D-: J2.3 U2.3 | length 1974.8
  Top Layer w10: J2.3 102.4,1647.6 102.4,1665.7 92.09,1676.01 92.09,1904.09 138,1950 220,1950 248.2,1978.2 248.2,2205.83 736.67,2694.3 816.7,2694.3 909,2602 909,2367 931.51,2344.49 U2.3
GND: C1.2 C2.2 C3.2 C4.1 C5.1 C6.1 C7.2 C8.2 C9.1 C10.1 C11.2 C12.1 C13.1 C14.2 J1.5 J2.6 J3.10 J3.11 J3.14 J5.1 P2.6 R2.1 SW1.1 SW1.3 U1.4 U1.17 U1.20 U1.24 U1.26 U1.33 U2.5 U2.15 U2.23 U2.35 U2.43 U3.1 U4.2 X1.2 X1.4 | length 14578.2
  Top Layer w10: J5.1 220,805 192.01,805 167.01,780 167.01,720 190,697.01 207.87,697.01 C13.1 344.88,280 364.88,260 700.55,260 710.55,270 U3.1 710.55,599 735.12,623.57 C11.2 ; v1(557,1900) 894.25,2237.25 ; C14.2 574.25,1454.25 P2.6 ; U4.2 680,861 700,841 C12.1 700,717.12 735.12,682 C11.2 ; U2.5 912.5,2281.5 894.25,2263.25 C8.2 894.25,2237.25 ; U2.43 1094.02,2411 1124.62,2380.39 1124.62,2267.22 1157.01,2234.84 U2.15 1157.01,1881.5 X1.2 1134,1857.24 1134,1656.47 1150,1640.47 C9.1 1209.53,1640.47 ; C6.1 1220,2665.12 1230,2675.12 1295,2675.12 ; U1.24 1221.1,907 1299.84,907 U1.20 1299.84,849.21 v2(1290,839.37) v2(1290,800) ; v2(1250.63,760.63) v2(1250.63,800) v2(1250.63,839.37) 1240.79,849.21 U1.26 1190,849.21 1180,878 1118,940 1035,940 996,979 996,1604 P2.6 ; v2(1290,760.63) 1280.16,750.79 U1.4 1280.16,699.16 ; v2(1329.37,760.63) v2(1329.37,800) ; U2.35 1345.98,2526 1309,2526 1295,2540 1295,2675.12 ; SW1.3 SW1.1 1347.95,2791.95 1340,2784 C5.1 ; U1.17 1385,912.72 1385,1055.12 ; C4.1 C5.1 ; v1(1640,2853) R2.1 1662,2500 1672,2490 1672,2410.89 1647.8,2386.69 1647.8,2196.3 1551.5,2100 C7.2 1551.5,2079.5 1540,2068 1500,2068 1490,2078 1490,2092.52 U2.23 1444.41,2048.38 1529.2,1963.59 1529.2,1900 1508,1878.8 1469.53,1878.8 C10.1 1469.53,1822.28 1410,1762.76 X1.4 1327,1762.76 1327,1694.47 1273,1640.47 1209.53,1640.47 ; J3.10 J3.11 2407.91,2457.91 2407.91,2642.09 J3.14 ; C11.2 959,660 960,659 1240,659 1280.16,699.16 ; P2.6 901.71,1781.71 901.71,1882 887.83,1895.88 887.83,2214.5 894.25,2220.92 894.25,2237.25 ; 1209.53,1640.47 1250,1600 C3.2 1272,1009.53 1317.59,1055.12 C2.2 1385,1055.12 ; 1280.16,699.16 1280.16,687.16 1123,530 1123,311.52 1178.52,256 1178.52,214.48 1178.82,214.18 1290,214.18 1301.18,225.36 J1.5 1301.18,302 1458,458.82 1458,646 1480,668 1585,668 1637,720 1637,840 1582,895 1545.12,895 C1.2 1545.12,1000 1490,1055.12 1385,1055.12 ; 1295,2675.12 C5.1
  Bottom Layer w10: J2.6 v1(557,1900) ; v2(1250.63,760.63) v2(1290,760.63) 1290.63,760 1328.74,760 v2(1329.37,760.63) ; v2(1250.63,839.37) 1251.26,840 1289.37,840 v2(1290,839.37) v2(1329.37,839.37) ; SW1.1 1399.37,2850 v1@1640,2850 ; v1(1640,2853) v1@1640,2850 ; J3.14 2392,2742 2392,2820 2362,2850 v1@1640,2850
IO8: J2.13 U2.28 | length 1463.2
  Top Layer w10: v1(1177,2271) 1219.73,2228.27 1260,2228.27 1288.73,2257 1397,2257 1404,2250 U2.28
  Bottom Layer w10: J2.13 466,2284 1164,2284 v1(1177,2271)
IO9: J2.14 U2.29 | length 2289.3
  Top Layer w10: J2.14 108,2658 108,2274 140,2242 184,2242 212,2214 v1(212,2000) ; U2.29 1494.5,2281.5 1515,2261 v1(1515,2239)
  Bottom Layer w10: v1(212,2000) 1276,2000 v1(1515,2239)
IO10: J2.15 U2.30 | length 2569.5
  Top Layer w10: U2.30 1489.01,2312.99 1491,2311 1567,2311 v1(1584,2328) ; v1(1624.45,2944) 1688.2,2880.25 1688.2,2322.2 v1(1684,2318)
  Bottom Layer w10: J2.15 108,2842 108,2920 132,2944 v1(1624.45,2944) ; v1(1584,2328) 1594,2318 v1(1684,2318)
IO11: J2.16 U2.12 | length 1456.9
  Top Layer w10: U2.12 1062.52,2314.52 v1(1069,2321)
  Bottom Layer w10: J2.16 729,2321 v1(1069,2321)
IO12: J2.17 U2.26 | length 3389.2
  Top Layer w10: v1(70,1560) 70,1652.28 59.69,1662.59 59.69,2909.69 J2.17 ; U2.26 v1(1539,2187)
  Bottom Layer w10: v1(70,1560) 70,1578.99 142.01,1651 260,1651 407,1798 896,1798 918,1820 918,1860 940,1882 1271,1882 1274.2,1878.8 1311,1878.8 1332.2,1900 1332.2,1980.2 v1(1539,2187)
IO13: J3.1 U2.32 | length 1621.6
  Top Layer w10: U2.32 1499,2375.98 v1(1526.98,2348) ; v1(1766,2364.2) 1766,1855 2221,1400 J3.1
  Bottom Layer w10: v1(1526.98,2348) 1543.18,2364.2 v1(1766,2364.2)
MISO: J3.16 P2.1 U2.11 | length 3253.3
  Top Layer w10: U2.11 1039,2092.52 1039,1898.61 1060,1877.61 P2.1
  Bottom Layer w10: P2.1 1314,1840 1348.4,1874.4 1348.4,1943.6 1580,2175.2 1580,2230 1534.8,2275.2 1294.8,2275.2 1263,2307 1198,2307 1166,2339 1166,2520 1215,2569 2059,2569 2140,2650 2380,2650 2409,2679 2409,2841 J3.16
MOSI: J2.1 P2.4 U2.10 | length 1433.6
  Top Layer w10: P2.4 1002,1782 1002,1888.6 930,1960.6 930,2100 954.02,2124.02 U2.10
  Bottom Layer w10: J2.1 620,1400 P2.4
NetC7_1: C7.1 FB1.1 U2.24 | length 508.8
  Top Layer w10: U2.24 1496,2124.02 1516.21,2103.81 ; FB1.1 1620.2,2360.43 1620.2,2207.8 1516.21,2103.81 ; 1516.21,2103.81 1520,2100.02 C7.1 1516.21,2103.81
NetC8_1: C8.1 U2.6 | length 69.8
  Top Layer w10: C8.1 U2.6
NetC9_2: C9.2 U2.16 X1.3 | length 389.5
  Top Layer w10: C9.2 1180,1730 1181.26,1731.26 X1.3 1227.9,1762.76 1227.9,1894.1 1205,1917 1205,1965.5 1188.5,1982 U2.16
NetC10_2: C10.2 U2.17 X1.1 | length 315
  Top Layer w10: U2.17 1220,1972 1259.8,1932.2 1259.8,1897.44 1300,1857.24 X1.1 1370,1857.24 1377.24,1850 C10.2
NetJ1_2: J1.2 U1.15 | length 1153.7
  Top Layer w10: v1(1200,390) 1200,382.25 1224.41,357.84 J1.2 ; U1.15 1550.79,849.21 v1(1600,800)
  Bottom Layer w10: v1(1200,390) 1510,390 1600,480 v1(1600,800)
NetJ1_3: J1.3 U1.14 | length 701
  Top Layer w10: J1.3 1250,436.01 1440,626.01 1440,790 1400.47,829.53 U1.14
NetP1_2: P1.2 U1.1
NetR2_2: R2.2 U2.33 | length 252.4
  Top Layer w10: U2.33 1496,2407.48 1496,2440 1518,2462 1637,2462 1637,2446.85 R2.2
NetU1_2: U1.2 U2.21 | length 1744.8
  Top Layer w10: v1(1174,696) 1240.79,696 U1.2 ; U2.21 1345.98,2078 1396,2078 1414,2060 1414,1994 v1(1493,1915)
  Bottom Layer w10: v1(1174,696) 1174,1596 v1(1493,1915)
NetU1_30: U1.30 U2.20 | length 1667
  Top Layer w10: v1(1018,770.47) U1.30 ; U2.20 1314.49,1981.51 1382,1914 v1(1413,1914)
  Bottom Layer w10: v1(1018,770.47) 1018,1464 1413,1859 v1(1413,1914)
RESET: D1.1 J2.5 J3.13 P2.5 R1.1 SW1.2 SW1.4 U2.13 | length 5544.3
  Top Layer w10: J2.5 108.29,1758.29 108.29,1682.72 133.01,1658 150.99,1658 191.71,1617.28 191.71,1582.72 167.28,1558.29 132.72,1558.29 86.2,1604.81 86.2,1658.99 75.89,1669.3 75.89,2684.88 147.58,2756.57 R1.1 958,2756.57 981.62,2780.2 D1.1 1092.05,2862.24 SW1.2 SW1.4 1332.47,3319 1521,3319 2208,2632 2318,2632 J3.13 ; v1(1089,1941) 1094.02,1946.02 U2.13
  Bottom Layer w10: J2.5 190,1840 P2.5 929,1909 1057,1909 v1(1089,1941)
SCK: J3.17 P2.3 U2.9 | length 3039.1
  Top Layer w10: P2.3 917.91,1882.09 917.91,1897.91 913,1902.82 913,2128.51 940,2155.51 U2.9
  Bottom Layer w10: P2.3 1010,1790 1287,1790 1372.2,1875.2 1372.2,1930.2 1400,1958 2384,1958 2426,2000 2426,2924 J3.17
SS: J2.2 U2.8 | length 1702.8
  Top Layer w10: v1(925,2191) 928.99,2187.01 U2.8
  Bottom Layer w10: J2.2 35.86,1500 30,1505.86 30,2068 120,2158 892,2158 v1(925,2191)
V_IN: C13.2 J3.15 U3.3 | length 4325.4
  Top Layer w10: U3.3 494.02,564.02 490,560 C13.2 455.12,652 393.91,713.21 200,713.21 183.21,730 183.21,770 200,786.79 320,786.79 330,796.79 330,2172 v1(788,2630)
  Bottom Layer w10: v1(788,2630) 958,2800 J3.15
pads on no net: J1.4 J1.MH1 J1.MH2 J1.Shell U1.3 U1.5 U1.6 U1.7 U1.8 U1.9 U1.10 U1.11 U1.12 U1.13 U1.18 U1.21 U1.22 U1.23 U1.25 U1.27 U1.28 U1.29 U1.31 U1.32 U2.7 U2.22 U4.4

## Polygon pours and split planes (outlines as drawn)
no net on Top Layer "GND" (solid, pour order 0): 20,3480 2470,3480 2480,3490 2490,3480 2490,50 50,50 10,90
no net on Bottom Layer "GND" (solid, pour order 2): 20,3480 2480,3480 2480,80 2440,40 50,40 10,80 10,3470

## Silkscreen, mask and mechanical layers (free items; w line width, h text height)
Top Overlay:
  lines w10: 300,230 300,780 360,840 880,840 940,780 940,240 880,180 350,180 300,230 ; 360,950 420,890 760,890 810,940 810,1130 760,1180 410,1180 360,1130 360,1120 360,950 ; 770,1570 770,3130 890,3250 1760,3250 1840,3170 1840,1570 1780,1510 830,1510 770,1570 ; 1150,640 1190,600 1380,600 1430,650 1430,780 1460,810 1550,810 1570,830 1570,1170 1530,1210 1190,1210 1150,1170 1150,640
  text "I/O Processing" at 960,3279.99 h60
  text "ICSP" at 800,1610 h60
  text "C&DH" at 1300,1220 h60
  text "3V3 Reg" at 360,1209.99 h60
  text "Power Select" at 1048,832 h30 r270
  text "3V3  |  5V" at 1557.02,752 h30 r270
  text "Power In" at 178,682 h30 r270
  text "5V Reg" at 540,99.99 h60

## Text inside footprints (layer, text, board x,y; h text height)
J1: Mechanical 2 "PCB Edge" at 1198.82,7.33 h16